# Altium PCB Main.PcbDoc
Units mil, origin at the board's own origin, x right, y up, seen from the top; angles counter-clockwise.
Board outline 8267.72 x 7086.61 mil, 2 copper layers (Top, Bottom), stack 61.811 mil thick; 78 components, 63 nets, 302 pads, 0 vias.
Unrouted connection lines stored in the file: 10.
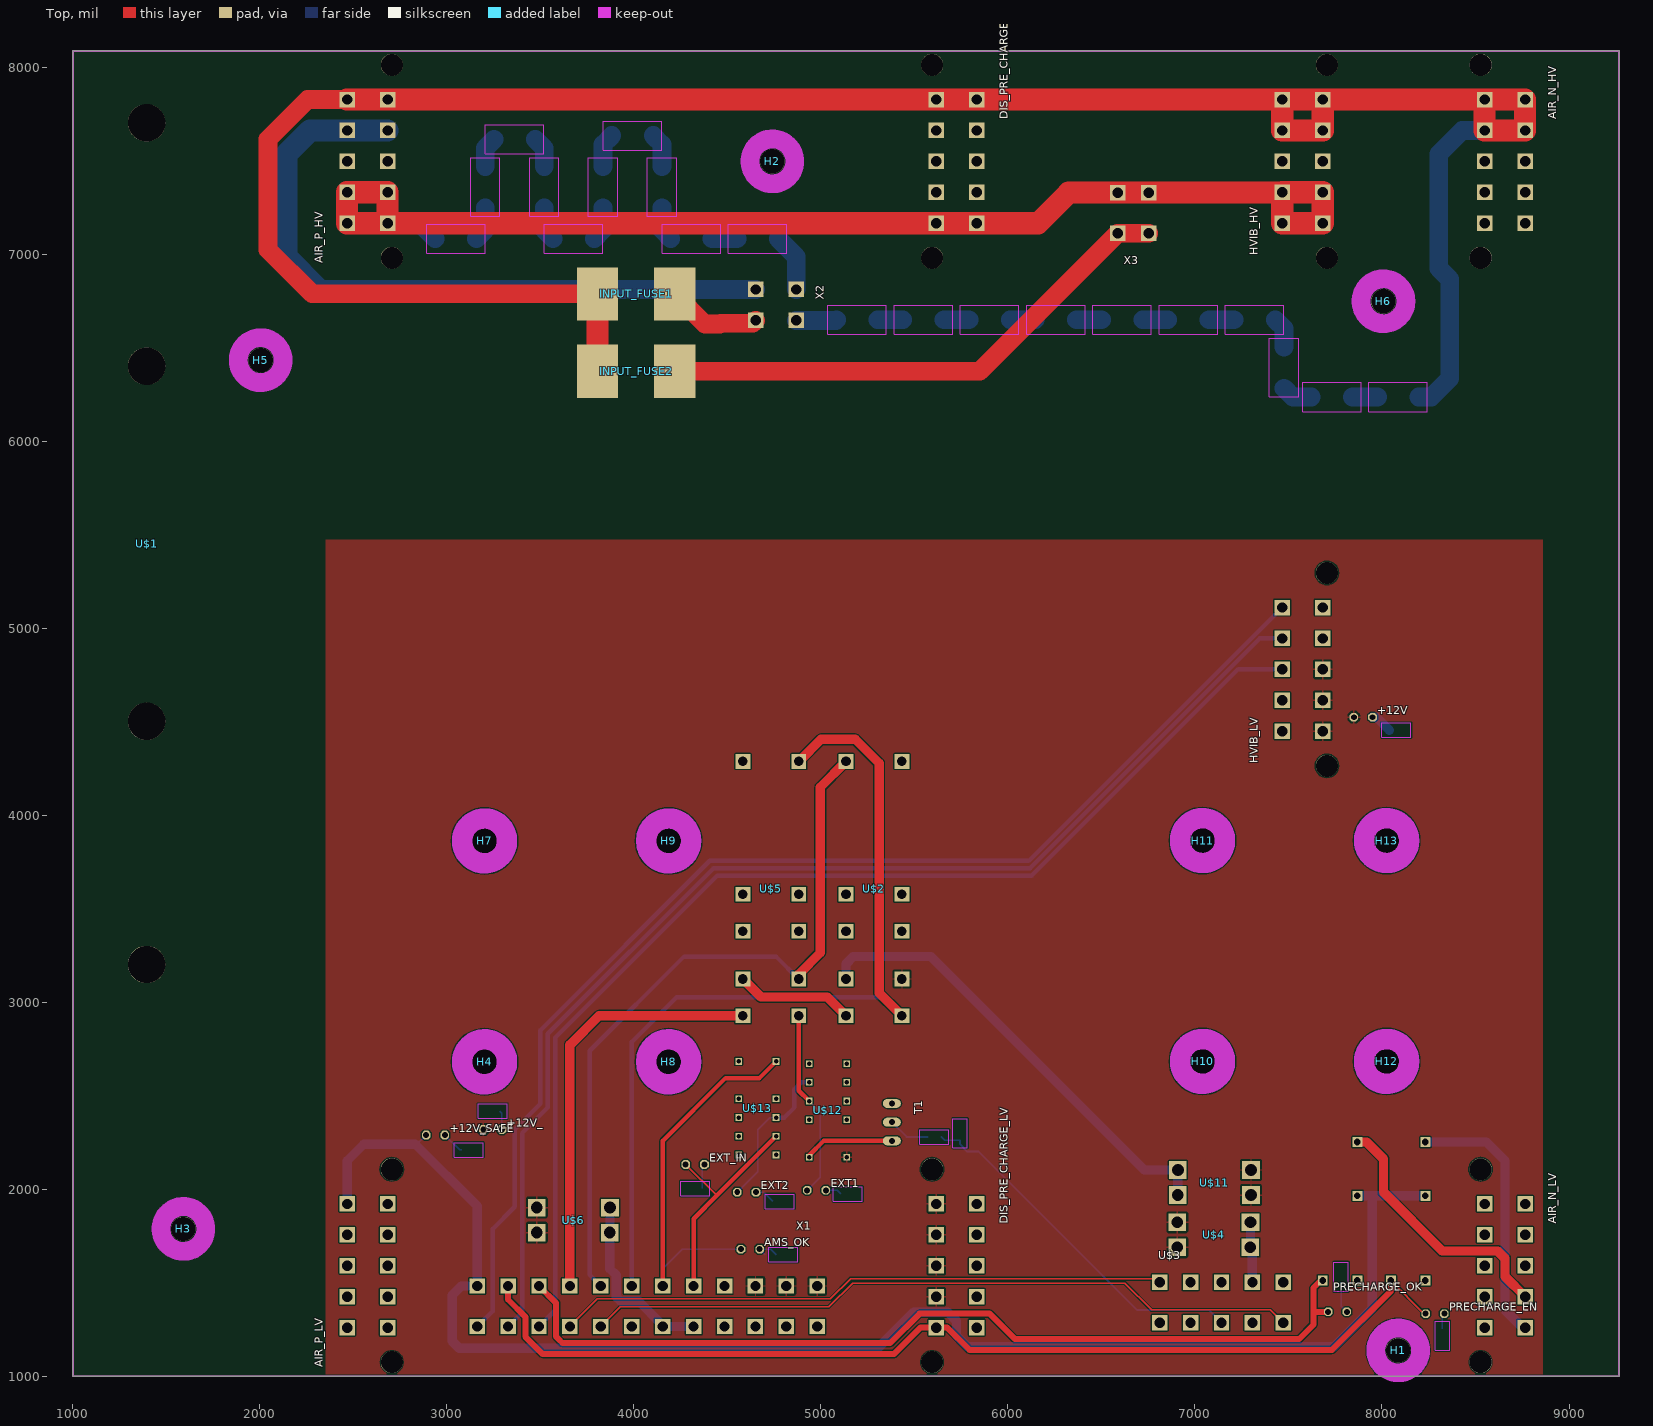
[diagram p0: Top view]
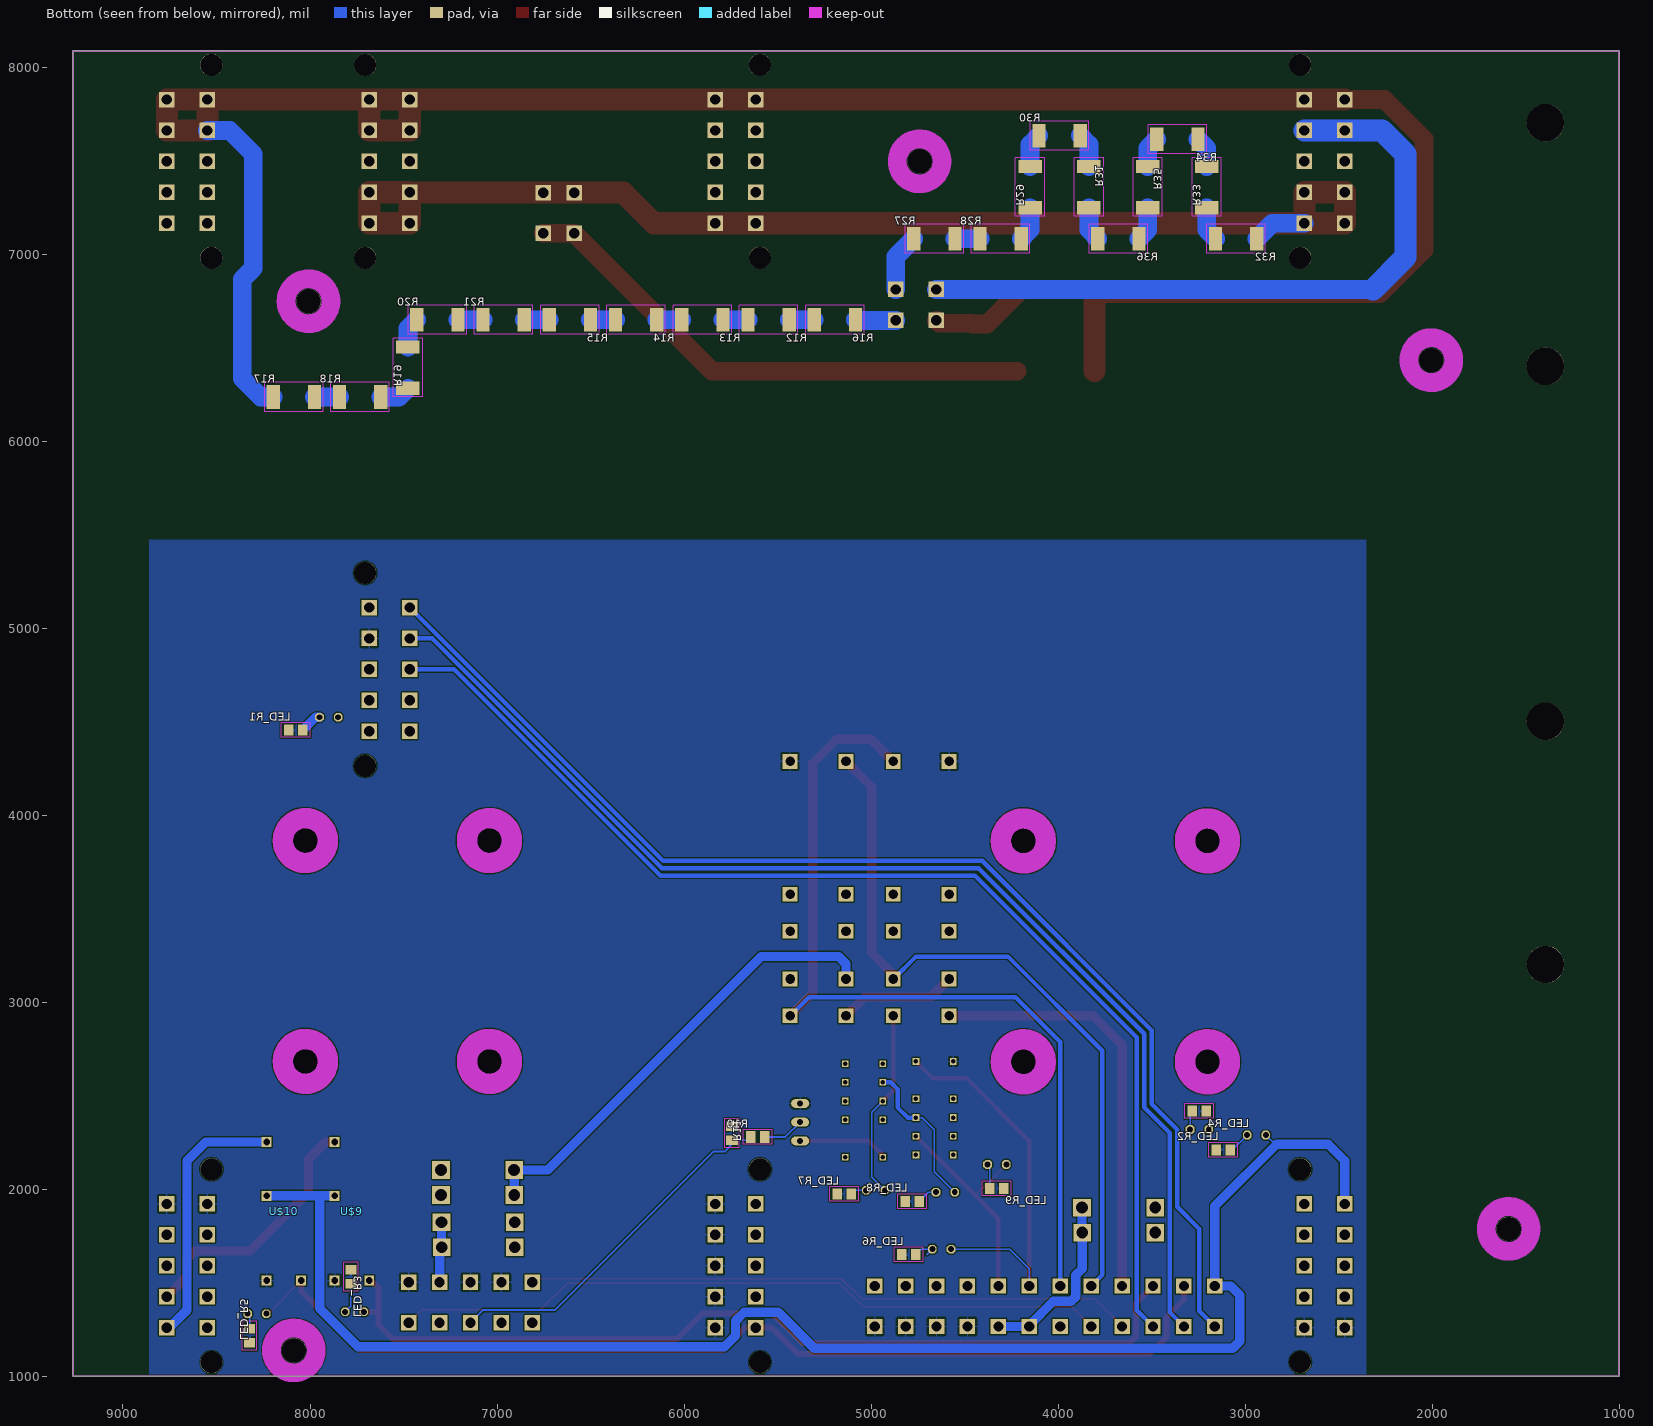
[diagram p1: Bottom view, seen from below]

## Layer stack, top to bottom
Top Solder: solder mask 0.4, Solder Resist, Dk 3.5
Top: signal copper 1.378
Dielectric 1: core 59.0551, FR-4, Dk 4.8
Bottom: signal copper 1.378
Bottom Solder: solder mask 0.4, Solder Resist, Dk 3.5

## Board outline
1000,1000 9267.72,1000 9267.72,8086.61 1000,8086.61

## Design rules (kind name [scope] priority, off if disabled: settings)
Clearance [All] p1: gap=6 ignorepadtopadclearanceinfootprint=FALSE except(0: SMDPad-SMDPad SMDPad-THPad SMDPad-Via)
Clearance "Clearance (Same Net)" [All] p2: gap=0 ignorepadtopadclearanceinfootprint=FALSE except(6: SMDPad-SMDPad SMDPad-THPad SMDPad-Via)
HoleSize HoleSize_1 [All] p1: absolutevalues=TRUE maxlimit=100000 minlimit=13.78 maxpercent=80.000 minpercent=20.000
HoleSize [All] p2: absolutevalues=TRUE maxlimit=100 minlimit=1 maxpercent=80.000 minpercent=20.000
HoleToHoleClearance mdViaViaSameLayer [All] p1: gap=6 allowstackedmicrovias=TRUE
HoleToHoleClearance [All] p2: gap=10 allowstackedmicrovias=TRUE
PasteMaskExpansion mlMinCreamFrame [All] p1: expansion=0
PasteMaskExpansion [All] p2: expansion=0
PolygonConnect ThermalVias [IsVia] p1: connectstyle=Direct reliefconductorwidth=10 reliefentries=4 polygonreliefangle="90 Angle" airgapwidth=10
PolygonConnect [All] p2: connectstyle=Relief reliefconductorwidth=10 reliefentries=4 polygonreliefangle="90 Angle" airgapwidth=10
RoutingVias [All] p1: holewidth=28 width=50 viastyle="Through Hole" minholewidth=28 minwidth=50 maxholewidth=28 maxwidth=50
SilkToSilkClearance [All] p1 off: silktosilkclearance=10
SilkToSolderMaskClearance [IsPad] p1 off: minsilkscreentomaskgap=10 clearancetoexposedcopper=TRUE
SolderMaskExpansion mlMinStopFrame [All] p1: expansion=4
SolderMaskExpansion [All] p2: expansion=4
Width Width_1 [All] p1: maxlimit=100000 minlimit=6 preferedwidth=10
Width [All] p2: maxlimit=10 minlimit=10 preferedwidth=10
25 further rules are at their usual default settings.

## Components (designator, comment, footprint, x,y, rotation, side; value= is the part's Value field where it differs from the comment)
+12V "" LED3MM 7899.61,4523.62 r0 top
+12V_ "" LED3MM 3244.09,2318.9 r0 top
+12V_SAFE "" LED3MM 2938.98,2289.37 r0 top
AIR_N_HV "15-24-7100" 5566-10-BMI 8657.48,7496.06 r90 top
AIR_N_LV "15-24-7100" 5566-10-BMI 8657.48,1590.55 r90 top
AIR_P_HV "15-24-7100" 5566-10-BMI 2574.8,7496.06 r270 top
AIR_P_LV "15-24-7100" 5566-10-BMI 2574.8,1590.55 r270 top
AMS_OK "" LED3MM 4622.05,1679.13 r0 top
DIS_PRE_CHARGE_HV "15-24-7100" 5566-10-BMI 5724.41,7496.06 r90 top
DIS_PRE_CHARGE_LV "15-24-7100" 5566-10-BMI 5724.41,1590.55 r90 top
EXT1 "" LED3MM 4976.38,1994.09 r0 top
EXT2 "" LED3MM 4602.36,1984.25 r0 top
EXT_IN "" LED3MM 4326.77,2131.89 r0 top
H1 "" 3,3 8086.61,1137.8 r0 top
H2 "" 3,3 4740.16,7496.06 r0 top
H3 "" 3,3 1590.55,1787.4 r0 top
H4 "" 3,6 3201.18,2681.1 r0 top
H5 "" 3,3 2003.94,6433.07 r0 top
H6 "" 3,3 8007.87,6748.03 r0 top
H7 "" 3,6 3201.18,3862.2 r0 top
H8 "" 3,6 4185.43,2681.1 r0 top
H9 "" 3,6 4185.43,3862.2 r0 top
H10 "" 3,6 7040.55,2683.07 r0 top
H11 "" 3,6 7040.55,3864.17 r0 top
H12 "" 3,6 8024.8,2683.07 r0 top
H13 "" 3,6 8024.8,3864.17 r0 top
HVIB_HV "15-24-7100" 5566-10-BMI 7574.8,7496.06 r270 top
HVIB_LV "15-24-7100" 5566-10-BMI 7574.8,4779.53 r270 top
INPUT_FUSE1 "088502.5DR" _CUSTOM_PARTS_LF_885 4011.81,6787.4 r0 top
INPUT_FUSE2 "088502.5DR" _CUSTOM_PARTS_LF_885 4011.81,6374.02 r180 top
LED_R1 "" R0805 8076.77,4454.72 r180 bottom
LED_R2 "" R0805 3116.14,2210.63 r180 bottom
LED_R3 "" R0805 7781.5,1531.5 r270 bottom
LED_R4 "" R0805 3244.09,2417.32 r0 bottom
LED_R5 "" R0805 8322.83,1216.54 r90 bottom
LED_R6 "" R0805 4799.21,1649.61 r180 bottom
LED_R7 "" R0805 5143.7,1974.41 r180 bottom
LED_R8 "" R0805 4779.53,1935.04 r180 bottom
LED_R9 "" R0805 4326.77,2003.94 r0 bottom
PRECHARGE_EN "" LED3MM 8283.46,1334.65 r0 top
PRECHARGE_OK "" LED3MM 7761.81,1344.49 r0 top
R10 "10K" M0805 5606.3,2279.53 r180 bottom
R11 "2.2K" M0805 5744.09,2299.21 r270 bottom
R12 "CRM2512-JW-102ELF" R2512 5547.24,6649.61 r0 bottom
R13 "CRM2512-JW-102ELF" R2512 5901.57,6649.61 r0 bottom
R14 "CRM2512-JW-102ELF" R2512 6255.91,6649.61 r0 bottom
R15 "CRM2512-JW-102ELF" R2512 6610.24,6649.61 r0 bottom
R16 "CRM2512-JW-102ELF" R2512 5192.91,6649.61 r0 bottom
R17 "CRM2512-JW-102ELF" R2512 8086.61,6236.22 r180 bottom
R18 "CRM2512-JW-102ELF" R2512 7732.28,6236.22 r180 bottom
R19 "CRM2512-JW-102ELF" R2512 7476.38,6393.7 r90 bottom
R20 "CRM2512-JW-102ELF" R2512 7318.9,6649.61 r180 bottom
R21 "CRM2512-JW-102ELF" R2512 6964.57,6649.61 r180 bottom
R27 "CRM2512-JW-102ELF" R2512 4661.42,7082.68 r180 bottom
R28 "CRM2512-JW-102ELF" R2512 4307.09,7082.68 r180 bottom
R29 "CRM2512-JW-102ELF" R2512 4149.61,7358.27 r90 bottom
R30 "CRM2512-JW-102ELF" R2512 3992.13,7633.86 r180 bottom
R31 "CRM2512-JW-102ELF" R2512 3834.65,7358.27 r270 bottom
R32 "CRM2512-JW-102ELF" R2512 3047.24,7082.68 r0 bottom
R33 "CRM2512-JW-102ELF" R2512 3204.72,7358.27 r90 bottom
R34 "CRM2512-JW-102ELF" R2512 3362.2,7614.17 r0 bottom
R35 "CRM2512-JW-102ELF" R2512 3519.69,7358.27 r270 bottom
R36 "CRM2512-JW-102ELF" R2512 3677.17,7082.68 r0 bottom
T1 "2N2222" TO92-EBC-OVAL 5429.13,2358.27 r270 top
U$1 "" MAINFUSEASSY 1393.7,3401.57 r90 top
U$2 "" SR4M4012_FOOT 5133.86,4287.4 r270 top
U$3 "39-28-1103" 39-28-1103 7141.73,1393.7 r180 top
U$4 "" 3568 6905.51,1688.98 r0 top
U$5 "" SR4M4012_FOOT 4582.68,4287.4 r270 top
U$6 "" 3568 3480.32,1767.72 r0 top
U$9 "" G5NB-1A-E 7683.07,1511.81 r90 bottom
U$10 "" G5NB-1A-E 8047.24,1511.81 r90 bottom
U$11 "" 3568 7299.21,2102.36 r180 top
U$12 "" V23079B1203B301 4937.01,2171.26 r90 top
U$13 "" V23079B1203B301 4759.84,2683.07 r270 top
X1 "5566-24" 5566-24 4070.87,1374.02 r180 top
X2 "5566-4" 5566-4 4759.84,6728.35 r90 top
X3 "5566-4" 5566-4 6669.29,7220.47 r0 top

## Footprints (in the part's own frame and the unit in brackets; to place one, negate y for a bottom-side part, rotate by r counter-clockwise, add the part's x,y. Pads: shape width x height; smd on the part's side, far side on the other; paste and mask are expansions set on the pad)
3,3 [mil] "3,3"
  round 129.92 hole 129.92: 1(0,0)
  Top keep-out circle w80: c0,0 r120
  Bottom keep-out circle w80: c0,0 r120
  Keep-Out Layer circle w100: c0,0 r120
  Keep-Out Layer circle w100: c0,0 r120
3,6 [mil] "3,6"
  round 141.73 hole 141.73: 1(0,0)
  Top keep-out circle w80: c0,0 r120
  Bottom keep-out circle w80: c0,0 r120
  Keep-Out Layer circle w109: c0,0 r120
  Keep-Out Layer circle w109: c0,0 r120
39-28-1103 [mil] "39-28-1103"
  rect 82.68x82.68 hole 55.12: 1(-330.71,-108.27) 2(-165.35,-108.27) 3(0,-108.27) 4(165.35,-108.27) 5(330.71,-108.27) 6(-330.71,108.27) 7(-165.35,108.27) 8(0,108.27) 9(165.35,108.27) 10(330.71,108.27)
3568 [mil] "3568"
  rect 94.48x94.48 hole 62.99: L1(0,133.86) L2(0,0) R1(391.34,133.86) R2(390.55,0)
5566-4 [mil] "5566-4"
  rect 82.68x82.68 hole 55.12: 1(82.68,-108.27) 2(-82.68,-108.27) 3(82.68,108.27) 4(-82.68,108.27)
5566-10-BMI [mm] "5566-10-BMI"
  round 3 hole 3: 1(-13.1,3.31) 1(13.1,3.31)
  rect 2.1x2.1 hole 1.4: 1(-8.4,-2.75) 2(-4.2,-2.75) 3(0,-2.75) 4(4.2,-2.75) 5(8.4,-2.75) 6(-8.4,2.75) 7(-4.2,2.75) 8(0,2.75) 9(4.2,2.75) 10(8.4,2.75)
5566-24 [mm] "5566-24"
  rect 2.1x2.1 hole 1.4: 1(23.1,-2.75) 2(18.9,-2.75) 3(14.7,-2.75) 4(10.5,-2.75) 5(6.3,-2.75) 6(2.1,-2.75) 7(-2.1,-2.75) 8(-6.3,-2.75) 9(-10.5,-2.75) 10(-14.7,-2.75) 11(-18.9,-2.75) 12(-23.1,-2.75) 13(23.1,2.75) 14(18.9,2.75) 15(14.7,2.75) 16(10.5,2.75) 17(6.3,2.75) 18(2.1,2.75) 19(-2.1,2.75) 20(-6.3,2.75) 21(-10.5,2.75) 22(-14.7,2.75) 23(-18.9,2.75) 24(-23.1,2.75)
_CUSTOM_PARTS_LF_885 [mil] "_CUSTOM_PARTS_LF_885"
  rect 220.47x284.65 smd: P$1(206.69,0) P$2(-206.69,0)
G5NB-1A-E [mm] "G5NB-1A-E"
  rect 1.35x1.35 hole 0.9: 1(0,4.7) 2(11.5,4.7) 3(18.8,4.7) 4(0,0)
LED3MM [mil] "LED3MM"
  oct 46.48x46.48 hole 32: A(-50,0) K(50,0)
M0805 [mil] "M0805"
  rect 51.18x62.99 smd: 1(-37.4,0) 2(37.4,0)
  Keep-Out Layer lines w2: 77.68,-38.7 -77.68,-38.7 -77.68,38.7 77.68,38.7 77.68,-38.7
MAINFUSEASSY [mil] "MAINFUSEASSY"
  round 200 hole 200: 1(-200,0) 1(1100,0) 1(3000,0) 1(4300,0)
R0805 [mil] "R0805"
  rect 51.18x59.06 smd: 1(-37.4,0) 2(37.4,0)
  Keep-Out Layer lines w2: 77.68,-38.7 77.68,38.7 -77.68,38.7 -77.68,-38.7 77.68,-38.7
R2512 [mil] "R2512"
  rect 70.87x125.98 smd: 1(-110.24,0) 2(110.24,0)
  Keep-Out Layer lines w2: -156.42,78.07 156.42,78.07 156.42,-78.07 -156.42,-78.07 -156.42,78.07
SR4M4012_FOOT [mm] "SR4M4012_FOOT"
  rect 2x2 hole 1.3: COIL+(0,7.6) COIL-(0,0) NCA4(18.05,0) NCB4(23.05,0) NOA1(18.05,7.6) NOA2(29.55,7.6) NOA3(29.55,0) NOB1(23.05,7.6) NOB2(34.55,7.6) NOB3(34.55,0)
TO92-EBC-OVAL [mil] "TO92-EBC-OVAL"
  oval 48x96 hole 32: B(0,-50) C(100,-50) E(-100,-50)
V23079B1203B301 [mil] "V23079B1203B301"
  rect 35.43x35.43 hole 23.62: 1(0,-200) 3(200,-200) 4(300,-200) 5(400,-200) 6(500,-200) 7(500,0) 8(400,0) 9(300,0) 10(200,0) 12(0,0)

## Part data
+12V +12V_ +12V_SAFE AMS_OK EXT1 EXT2 EXT_IN PRECHARGE_EN PRECHARGE_OK: library part LED3MM
AIR_N_HV AIR_N_LV AIR_P_HV AIR_P_LV DIS_PRE_CHARGE_HV DIS_PRE_CHARGE_LV HVIB_HV HVIB_LV: library part 5566-10-BMI
H1 H2 H3 H5 H6: library part 3,3
H4 H7 H8 H9 H10 H11 H12 H13: library part 3,6
INPUT_FUSE1 INPUT_FUSE2: library part _CUSTOM_PARTS_LF_885
LED_R1 LED_R2 LED_R3 LED_R4 LED_R5 LED_R6 LED_R7 LED_R8 LED_R9: library part R0805
R10 R11: library part M0805
R12 R13 R14 R15 R16 R17 R18 R19 R20 R21 R27 R28 R29 R30 R31 R32 R33 R34 R35 R36: library part R2512
T1: library part TO92-EBC-OVAL
U$1: library part MAINFUSEASSY
U$2 U$5: library part SR4M4012_FOOT
U$4 U$6 U$11: library part 3568
U$9 U$10: library part G5NB-1A-E
U$12 U$13: library part V23079B1203B301

## Nets (pads, with @x,y where several pads share a name; then routed paths per layer and width w, separated by ;. In a path a pad name is that pad's centre, name@x,y a point inside that pad or via, vN(x,y) a via of type N, cw(c..) or ccw(c..) an arc to the next point about the centre after c; other vN are vias at no path point)
+12V: +12V.A +12V_.A DIS_PRE_CHARGE_LV.7 DIS_PRE_CHARGE_LV.8 DIS_PRE_CHARGE_LV.9 DIS_PRE_CHARGE_LV.10 HVIB_LV.8 HVIB_LV.9 HVIB_LV.10 U$2.NOA2 U$4.L1 U$4.L2 U$6.L1 U$6.L2 U$11.L1 U$11.L2 U$12.1 X1.10 X1.11 X1.12
+12V_SAFE: +12V_SAFE.A AIR_P_LV.1@2466.53,1921.26 U$9.2 U$10.2 X1.1 | length 8208.8
  Bottom w7.87: 2830.71,2240.16 2839.76,2240.16 +12V_SAFE.A
  Bottom w50: AIR_P_LV.1@2466.54,1921.26 2466.54,2151.57 2555.12,2240.16 2830.71,2240.16 3161.42,1909.45 X1.1 ; X1.1@3151.57,1472.44 X1.1 ; U$9.2 7948.82,1964.57 ; U$10.2 7948.82,1964.57 ; X1.1 3076.77,1482.28 3027.56,1433.07 3027.56,1188.11 3066.93,1148.74 5302.28,1148.74 5495.47,1341.93 5677.76,1341.93 5724.41,1295.28 5724.41,1216.54 5783.46,1157.48 7743.34,1157.48 7948.82,1362.96 7948.82,1964.57
ACC_LGHT: HVIB_LV.1@7466.53,5110.24 X1.13 | length 6627.5
  Bottom w24: X1.13 3244.09,1348.43 3244.09,1787.4 3362.2,1905.51 3362.2,2318.9 3500,2456.69 3500,2850.39 4405.51,3755.91 6112.2,3755.91 HVIB_LV.1@7466.54,5110.24
AIR+_COIL: AIR_N_LV.2 U$9.3 | length 1400.4
  Top w50: U$9.3 7917.32,2251.97 8007.87,2161.42 8007.87,1984.25 8322.83,1669.29 8618.11,1669.29 8657.48,1629.92 8657.48,1533.46 AIR_N_LV.2
AMS_12V: U$6.R1 U$6.R2 X1.19 X1.20 | length 974.3
  Bottom w50: U$6.R1@3871.65,1901.57 3871.65,1768.5 U$6.R2 3870.87,1574.56 3906.1,1539.32 3906.1,1424.07 3929.97,1400.2 4025,1400.2 4153.54,1271.65 4153.54,1265.75 X1.20
AMS_OK: AMS_OK.A U$13.12 X1.7 | length 2112.4
  Top w24: X1.7@4153.54,1482.28 4153.54,2258.06 4489.97,2594.49 4671.26,2594.49 U$13.12
  Bottom w7.87: X1.7@4153.54,1482.28 4153.54,1574.8 4257.87,1679.13 AMS_OK.A
EM_HV+: INPUT_FUSE1.P$1 X2.4 | length 508.1
  Top w100: INPUT_FUSE1.P$1 4379.92,6625.98 4460.63,6625.98 4464.57,6629.92 4635.83,6629.92 X2.4
EXT1: EXT1.A U$5.NOB2 U$12.9 | length 1009.2
  Top w24: U$5.NOB2 4881.89,2526.38 U$12.9
  Bottom w7.87: EXT1.A 4996.06,2063.78 4996.06,2412.2 U$12.9
EXT2: EXT2.A U$12.8 U$13.9 | length 829.2
  Bottom w7.87: EXT2.A@4552.36,1972.63 EXT2.A 4661.42,2093.31 4661.42,2318.9 4725.59,2383.07 U$13.9
  Bottom w24: U$13.9 4804.33,2383.07 4858.27,2437.01 4858.27,2535.43 4894.09,2571.26 U$12.8
GND: AIR_N_LV.5 AIR_N_LV.10 AIR_P_LV.5 AIR_P_LV.10 DIS_PRE_CHARGE_LV.1@5832.68,1259.84 DIS_PRE_CHARGE_LV.2 DIS_PRE_CHARGE_LV.3 DIS_PRE_CHARGE_LV.4 DIS_PRE_CHARGE_LV.5 HVIB_LV.7 LED_R1.1 LED_R2.1 LED_R3.1 LED_R4.1 LED_R5.1 LED_R6.1 LED_R7.1 LED_R8.1 LED_R9.1 R11.1 T1.E U$2.COIL+ U$3.1 U$3.3 U$3.4 U$5.COIL- U$9.1 U$10.1 U$13.1 X1.21 X1.22 X1.23 X1.24
HV-_DRY_AUX: AIR_P_HV.2 AIR_P_HV.7 X2.3 | length 3726.3
  Bottom w100: 2314.96,6811.02 X2.3
  Bottom w118.11: 2314.96,6811.02 2141.73,6984.25 2141.73,7535.43 2267.72,7661.42 AIR_P_HV.2 AIR_P_HV.7
IMD_12V: U$3.2 U$4.R1 U$4.R2 | length 325.8
  Bottom w50: U$4.R1 7296.85,1689.76 U$4.R2 7307.09,1677.95 U$3.2
IMD_OK_GND: T1.C U$12.12 | length 485.2
  Top w24: U$12.12 4937.01,2181.1 5015.75,2259.84 5377.56,2259.84 T1.C
IMD_PWM_HS: U$3.5 X1.16 | length 3267.7
  Top w7.87: X1.16 3804.67,1412.94 5050.36,1412.94 5159.07,1521.65 6791.34,1521.65 U$3.5
IMD_PWM_LS: U$3.6 X1.17 | length 3833.9
  Top w7.87: X1.17 3927.17,1370.08 5040.9,1370.08 5168.86,1498.03 6624.02,1498.03 6767.72,1354.33 7403.54,1354.33 U$3.6
IMD_STATUS: R10.1 R11.2 U$3.8 | length 1922.5
  Bottom w10: R10.1 5661.42,2261.81 R11.2 5744.09,2240.16 5783.46,2200.79 5842.52,2200.79 6688.98,1354.33 7072.83,1354.33 U$3.8
INT_RST1: U$2.NOB2 U$5.COIL+ X1.6 | length 4823.1
  Top w50: U$5.COIL+ 5000,4405.51 5183.07,4405.51 5311.02,4277.56 5311.02,3049.21 U$2.NOB2
  Bottom w24: X1.6 3988.19,2787.4 4228.35,3027.56 5330.71,3027.56 5431.1,2927.17 U$2.NOB2
INT_RST2: U$2.COIL- U$5.NOA2 X1.5 | length 3929.4
  Top w50: U$5.NOA2 4881.89,3149.61 4996.06,3263.78 4996.06,4149.61 U$2.COIL-
  Bottom w24: X1.5 3763.78,1541.34 3763.78,2740.16 4267.72,3244.09 4759.84,3244.09 U$5.NOA2@4881.89,3122.05
  Bottom w50: U$5.NOA2@4881.89,3122.05 U$5.NOA2
N$1: HVIB_LV.6
N$2: +12V.K LED_R1.2 | length 118.3
  Bottom w50: +12V.K 7970.47,4523.62 LED_R1.2
N$3: R10.2 T1.B | length 222.4
  Bottom w10: T1.B 5457.87,2279.53 R10.2
N$4: U$2.NOA3 U$11.R1 U$11.R2 | length 2478.9
  Bottom w50: U$2.NOA3 5133.86,3204.72 5173.23,3244.09 5586.61,3244.09 6728.35,2102.36 U$11.R2 6907.87,2101.57 U$11.R1
N$5: +12V_.K LED_R4.2 | length 103.6
  Bottom w7.87: LED_R4.2 3294.09,2404.72 +12V_.K
N$6: +12V_SAFE.K LED_R2.2 | length 122.4
  Bottom w7.87: +12V_SAFE.K 3067.72,2210.63 LED_R2.2
N$7: LED_R5.2 PRECHARGE_EN.K | length 85.1
  Bottom w7.87: LED_R5.2 8322.83,1324.02 PRECHARGE_EN.K
N$8: LED_R3.2 PRECHARGE_OK.K | length 163.3
  Bottom w7.87: LED_R3.2 7781.5,1374.8 PRECHARGE_OK.K PRECHARGE_OK.K@7812.99,1344.49
N$9: INPUT_FUSE2.P$2 X3.1 X3.2 | length 2839.2
  Top w100: INPUT_FUSE2.P$2 5848.43,6374.02 X3.2 X3.1
N$10: R12.1 R16.2 | length 133.9
  Bottom w100: R16.2 R12.1
N$11: AMS_OK.K LED_R6.2 | length 143.7
  Bottom w7.87: 4701.57,1649.61 AMS_OK.K 4732.28,1679.13 LED_R6.2
N$12: HVIB_LV.4
N$13: EXT1.K LED_R7.2 | length 88.1
  Bottom w7.87: EXT1.K 5086.61,1994.09 LED_R7.2
N$14: EXT2.K LED_R8.2 | length 110.2
  Bottom w7.87: EXT2.K 4692.91,1984.25 LED_R8.2
N$15: EXT_IN.K LED_R9.2 | length 147.1
  Bottom w7.87: LED_R9.2 4364.17,2119.29 EXT_IN.K EXT_IN.K@4386.61,2122.05
N$16: HVIB_LV.5
N$17: R12.2 R13.1 | length 133.9
  Bottom w100: R12.2 R13.1
N$18: R13.2 R14.1 | length 133.9
  Bottom w100: R13.2 R14.1
N$19: R14.2 R15.1 | length 133.9
  Bottom w100: R14.2@6366.14,6649.61 R15.1
N$20: R15.2 R21.2 | length 133.9
  Bottom w100: R15.2 R21.2
N$21: R20.2 R21.1 | length 133.9
  Bottom w100: R21.1 R20.2
N$22: R19.2 R20.1 | length 165.2
  Bottom w100: R20.1 7476.38,6602.36 R19.2
N$23: R18.2 R19.1 | length 165.2
  Bottom w100: R19.1 7523.62,6236.22 R18.2
N$24: R17.2 R18.1 | length 133.9
  Bottom w100: R18.1 R17.2
N$32: R27.2 R28.1 | length 133.9
  Bottom w100: R28.1 R27.2
N$33: R28.2 R29.1 | length 184.9
  Bottom w100: R29.1 4149.61,7129.92 R28.2
N$34: R29.2 R30.1 | length 184.9
  Bottom w100: R30.1 4149.61,7586.61 R29.2
N$35: R30.2 R31.1 | length 184.9
  Bottom w100: R31.1 3834.65,7586.61 R30.2
N$36: R31.2 R36.2 | length 184.9
  Bottom w100: R36.2 3834.65,7129.92 R31.2
N$37: R35.2 R36.1 | length 184.9
  Bottom w100: R35.2 3519.69,7129.92 R36.1
N$38: R34.2 R35.1 | length 165.2
  Bottom w100: R34.2 3519.69,7566.93 R35.1
N$39: R33.2 R34.1 | length 165.2
  Bottom w100: R33.2 3204.72,7566.93 R34.1
N$40: R32.2 R33.1 | length 184.9
  Bottom w100: R32.2 3204.72,7129.92 R33.1
PRECHARGE: AIR_N_LV.1@8765.75,1259.84 U$10.3 | length 1411.4
  Bottom w50: U$10.3 8556.94,2251.97 8657.48,2151.42 8657.48,1354.33 8751.97,1259.84 AIR_N_LV.1@8765.75,1259.84
PRECHARGE_EN: DIS_PRE_CHARGE_LV.6 PRECHARGE_EN.A U$10.4 X1.2 | length 5531.6
  Top w7.87: U$10.4 8224.41,1334.65 PRECHARGE_EN.A
  Top w32: X1.2 3326.77,1409.83 3419.04,1317.56 3419.04,1211.26 3512.19,1118.11 5389.76,1118.11 5531.5,1259.84 DIS_PRE_CHARGE_LV.6 5675.2,1259.84 5795.3,1139.74 7732.28,1139.74 8047.24,1454.7 U$10.4
PRECHARGE_OK: PRECHARGE_OK.A U$9.4 X1.3 | length 4871.7
  Top w32: X1.3 3584.39,1390.02 3584.39,1211.26 3598.43,1197.23 3598.43,1196.85 3618.11,1177.17 5370.08,1177.17 5527.56,1334.65 5901.57,1334.65 6038.58,1197.64 7555.91,1197.64 7633.86,1275.59 7633.86,1354.33 ; U$9.4 7673.23,1511.81 7633.86,1472.44 7633.86,1354.33 ; PRECHARGE_OK.A 7643.7,1344.49 7633.86,1354.33
SAF_EXT_IN: EXT_IN.A U$13.8 X1.8 | length 1218.3
  Top w7.87: EXT_IN.A 4442.32,1966.34 4443.11,1966.34
  Top w24: X1.8 4318.9,1842.13 4443.11,1966.34 U$13.8
SAF_MAIN: U$2.NOB3 U$5.NOA3 | length 632.7
  Top w50: U$5.NOA3 4679.13,3027.56 5033.46,3027.56 U$2.NOB3
SAF_MAIN_OUT: U$5.NOB3 X1.4 | length 2279
  Top w50: X1.4 3657.48,2771.65 3812.99,2927.17 U$5.NOB3
TSAL_GRN_GND: HVIB_LV.2 X1.14 | length 6455.9
  Bottom w24: X1.14 3401.57,1340.55 3401.57,2299.21 3539.37,2437.01 3539.37,2830.71 4425.2,3716.54 6118.11,3716.54 7346.46,4944.88 HVIB_LV.2
TSAL_RED_GND: HVIB_LV.3 X1.15 | length 6284.3
  Bottom w24: X1.15 3578.74,1352.36 3578.74,2811.02 4444.88,3677.17 6127.95,3677.17 7230.32,4779.53 HVIB_LV.3
TSMP+: R16.1 X2.2 | length 216.2
  Bottom w100: X2.2 5078.74,6645.67 R16.1
TSMP-: R27.1 X2.1 | length 311.6
  Bottom w100: R27.1@4771.65,7082.68 4868.11,6986.22 X2.1
V+: AIR_N_HV.4 AIR_N_HV.5 AIR_N_HV.9 AIR_N_HV.10 AIR_P_HV.1@2466.53,7826.77 AIR_P_HV.6 DIS_PRE_CHARGE_HV.5 DIS_PRE_CHARGE_HV.10 HVIB_HV.1@7466.53,7826.77 HVIB_HV.2 HVIB_HV.6 HVIB_HV.7 INPUT_FUSE1.P$2 INPUT_FUSE2.P$1 R17.1 | length 12498.2
  Top w100: AIR_P_HV.1@2466.54,7826.77 2255.91,7826.77 2043.31,7614.17 2043.31,7023.62 2279.53,6787.4 INPUT_FUSE1.P$2
  Top w118.11: AIR_P_HV.1@2466.54,7826.77 AIR_P_HV.6 DIS_PRE_CHARGE_HV.10 DIS_PRE_CHARGE_HV.5 HVIB_HV.1@7466.54,7826.77 ; INPUT_FUSE2.P$1 INPUT_FUSE1.P$2 ; HVIB_HV.1@7466.54,7826.77 HVIB_HV.6 ; HVIB_HV.1@7466.54,7826.77 HVIB_HV.2 HVIB_HV.7 HVIB_HV.6 ; HVIB_HV.6 AIR_N_HV.10 ; AIR_N_HV.10 AIR_N_HV.5 AIR_N_HV.4 AIR_N_HV.9 AIR_N_HV.10
  Bottom w100: R17.1 8263.78,6236.22 8362.2,6334.65 8362.2,6866.14 8303.15,6925.2 8303.15,7535.43 8429.13,7661.42 AIR_N_HV.9
V-: AIR_P_HV.4 AIR_P_HV.5 AIR_P_HV.9 AIR_P_HV.10 DIS_PRE_CHARGE_HV.1@5832.68,7165.35 DIS_PRE_CHARGE_HV.6 HVIB_HV.4 HVIB_HV.5 HVIB_HV.9 HVIB_HV.10 R32.1 X3.3 X3.4 | length 6667.7
  Top w118.11: AIR_P_HV.10 AIR_P_HV.9 AIR_P_HV.4 AIR_P_HV.5 AIR_P_HV.10 ; AIR_P_HV.10 DIS_PRE_CHARGE_HV.6 5832.68,7165.35 6161.42,7165.35 6324.8,7328.74 X3.4 X3.3 7464.57,7328.74 HVIB_HV.4 ; HVIB_HV.4 HVIB_HV.9 HVIB_HV.10 HVIB_HV.5 HVIB_HV.4
  Bottom w100: AIR_P_HV.10 2854.33,7165.35 R32.1
pads on no net: AIR_N_HV.1 AIR_N_HV.2 AIR_N_HV.3 AIR_N_HV.6 AIR_N_HV.7 AIR_N_HV.8 AIR_N_LV.1@8527.16,1074.8 AIR_N_LV.1@8527.16,2106.3 AIR_N_LV.3 AIR_N_LV.4 AIR_N_LV.6 AIR_N_LV.7 AIR_N_LV.8 AIR_N_LV.9 AIR_P_HV.1@2705.12,6980.31 AIR_P_HV.1@2705.12,8011.81 AIR_P_HV.3 AIR_P_HV.8 AIR_P_LV.1@2705.12,1074.8 AIR_P_LV.1@2705.12,2106.3 AIR_P_LV.2 AIR_P_LV.3 AIR_P_LV.4 AIR_P_LV.6 AIR_P_LV.7 AIR_P_LV.8 AIR_P_LV.9 DIS_PRE_CHARGE_HV.1@5594.09,6980.31 DIS_PRE_CHARGE_HV.1@5594.09,8011.81 DIS_PRE_CHARGE_HV.2 DIS_PRE_CHARGE_HV.3 DIS_PRE_CHARGE_HV.4 DIS_PRE_CHARGE_HV.7 DIS_PRE_CHARGE_HV.8 DIS_PRE_CHARGE_HV.9 DIS_PRE_CHARGE_LV.1@5594.09,1074.8 DIS_PRE_CHARGE_LV.1@5594.09,2106.3 H1.1 H2.1 H3.1 H4.1 H5.1 H6.1 H7.1 H8.1 H9.1 H10.1 H11.1 H12.1 H13.1 HVIB_HV.1@7705.12,6980.31 HVIB_HV.1@7705.12,8011.81 HVIB_HV.3 HVIB_HV.8 HVIB_LV.1@7705.12,4263.78 HVIB_LV.1@7705.12,5295.28 U$1.1 U$2.NCA4 U$2.NCB4 U$2.NOA1 U$2.NOB1 U$3.7 U$3.9 U$3.10 U$5.NCA4 U$5.NCB4 U$5.NOA1 U$5.NOB1 U$12.3 U$12.4 U$12.5 U$12.6 U$12.7 U$12.10 U$13.3 U$13.4 U$13.5 U$13.6 U$13.7 U$13.10 X1.9 X1.18

## Polygon pours and split planes (outlines as drawn)
GND on Bottom "Bottom-GND" (solid, remove dead copper, pour order 0): 2352.95,5473.82 8859.65,5473.82 8859.65,738.78 2352.95,738.78
+12V on Top "Top-+12V" (solid, remove dead copper, pour order 2): 2352.95,5473.82 8859.65,5473.82 8859.65,778.15 2352.95,778.15

## Keep-outs
Keep-Out Layer:
  the board outline again, w10

## Silkscreen, mask and mechanical layers (free items; w line width, h text height)
Dimension:
  the board outline again, w10
Top Assembly:
  lines w6: 2535.43,5448.82 2535.43,4307.09 4346.46,4307.09 ; 2574.8,1118.11 2614.17,1157.48 2614.17,2102.36 4385.83,2102.36 ; 5724.41,8047.24 5763.78,8047.24
  lines w157.48: 2279.53,1019.69 2279.53,5566.93 8933.07,5566.93 8933.07,1000
Unrouted:
  lines w0: 5616.14,1425.2 5616.14,1590.55
_tsilk:
  lines w6: 2003.94,1118.11 4385.83,1118.11 4385.83,5409.45 2023.62,5409.45 2003.94,1118.11 ; 5251.97,1078.74 6551.18,1078.74 6551.18,8047.24 5251.97,8047.24 5251.97,1078.74 ; 6669.29,1118.11 9031.5,1118.11 9031.5,5409.45 6669.29,5409.45 6669.29,1118.11
  text "Main" at 1196.85,5857.71 h133.3
  text "Fuse" at 1196.85,5724.41 h133.3

## Dimensions
1000,8086.61 to 1000,1000 on Top
9267.72,8086.61 to 1000,8086.61 on Top
2574.8,921.26 to 8834.65,921.26 on Reference
2220.47,7496.06 to 2220.47,1590.55 on Reference

## Text inside footprints (layer, text, board x,y; h text height)
U$2: Top Assembly "24" at 5380.53,3546.23 h77.5 r90; Top Assembly "23" at 5379.67,3349.22 h77.5 r90; Top Assembly "44" at 5380.37,3092.34 h77.5 r90; Top Assembly "43" at 5379.67,2895.33 h77.5 r90; Top Assembly "11" at 5242.74,3561.24 h77.5 r90; Top Assembly "12" at 5242.74,3355.3 h77.5 r90; Top Assembly "34" at 5241.88,3094.44 h77.5 r90; Top Assembly "33" at 5241.88,2897.43 h77.5 r90
U$5: Top Assembly "24" at 4829.35,3546.23 h77.5 r90; Top Assembly "23" at 4828.49,3349.22 h77.5 r90; Top Assembly "44" at 4829.19,3092.34 h77.5 r90; Top Assembly "43" at 4828.49,2895.33 h77.5 r90; Top Assembly "11" at 4691.56,3561.24 h77.5 r90; Top Assembly "12" at 4691.56,3355.3 h77.5 r90; Top Assembly "34" at 4690.7,3094.44 h77.5 r90; Top Assembly "33" at 4690.7,2897.43 h77.5 r90